# Altium PCB B6-1-1.PcbDoc
Units mil, origin at the board's own origin, x right, y up, seen from the top; angles counter-clockwise.
Board outline 2086.62 x 2086.62 mil, 2 copper layers (Top Layer, Bottom Layer); 69 components, 44 nets, 195 pads, 30 vias.
Unrouted connection lines stored in the file: 34.
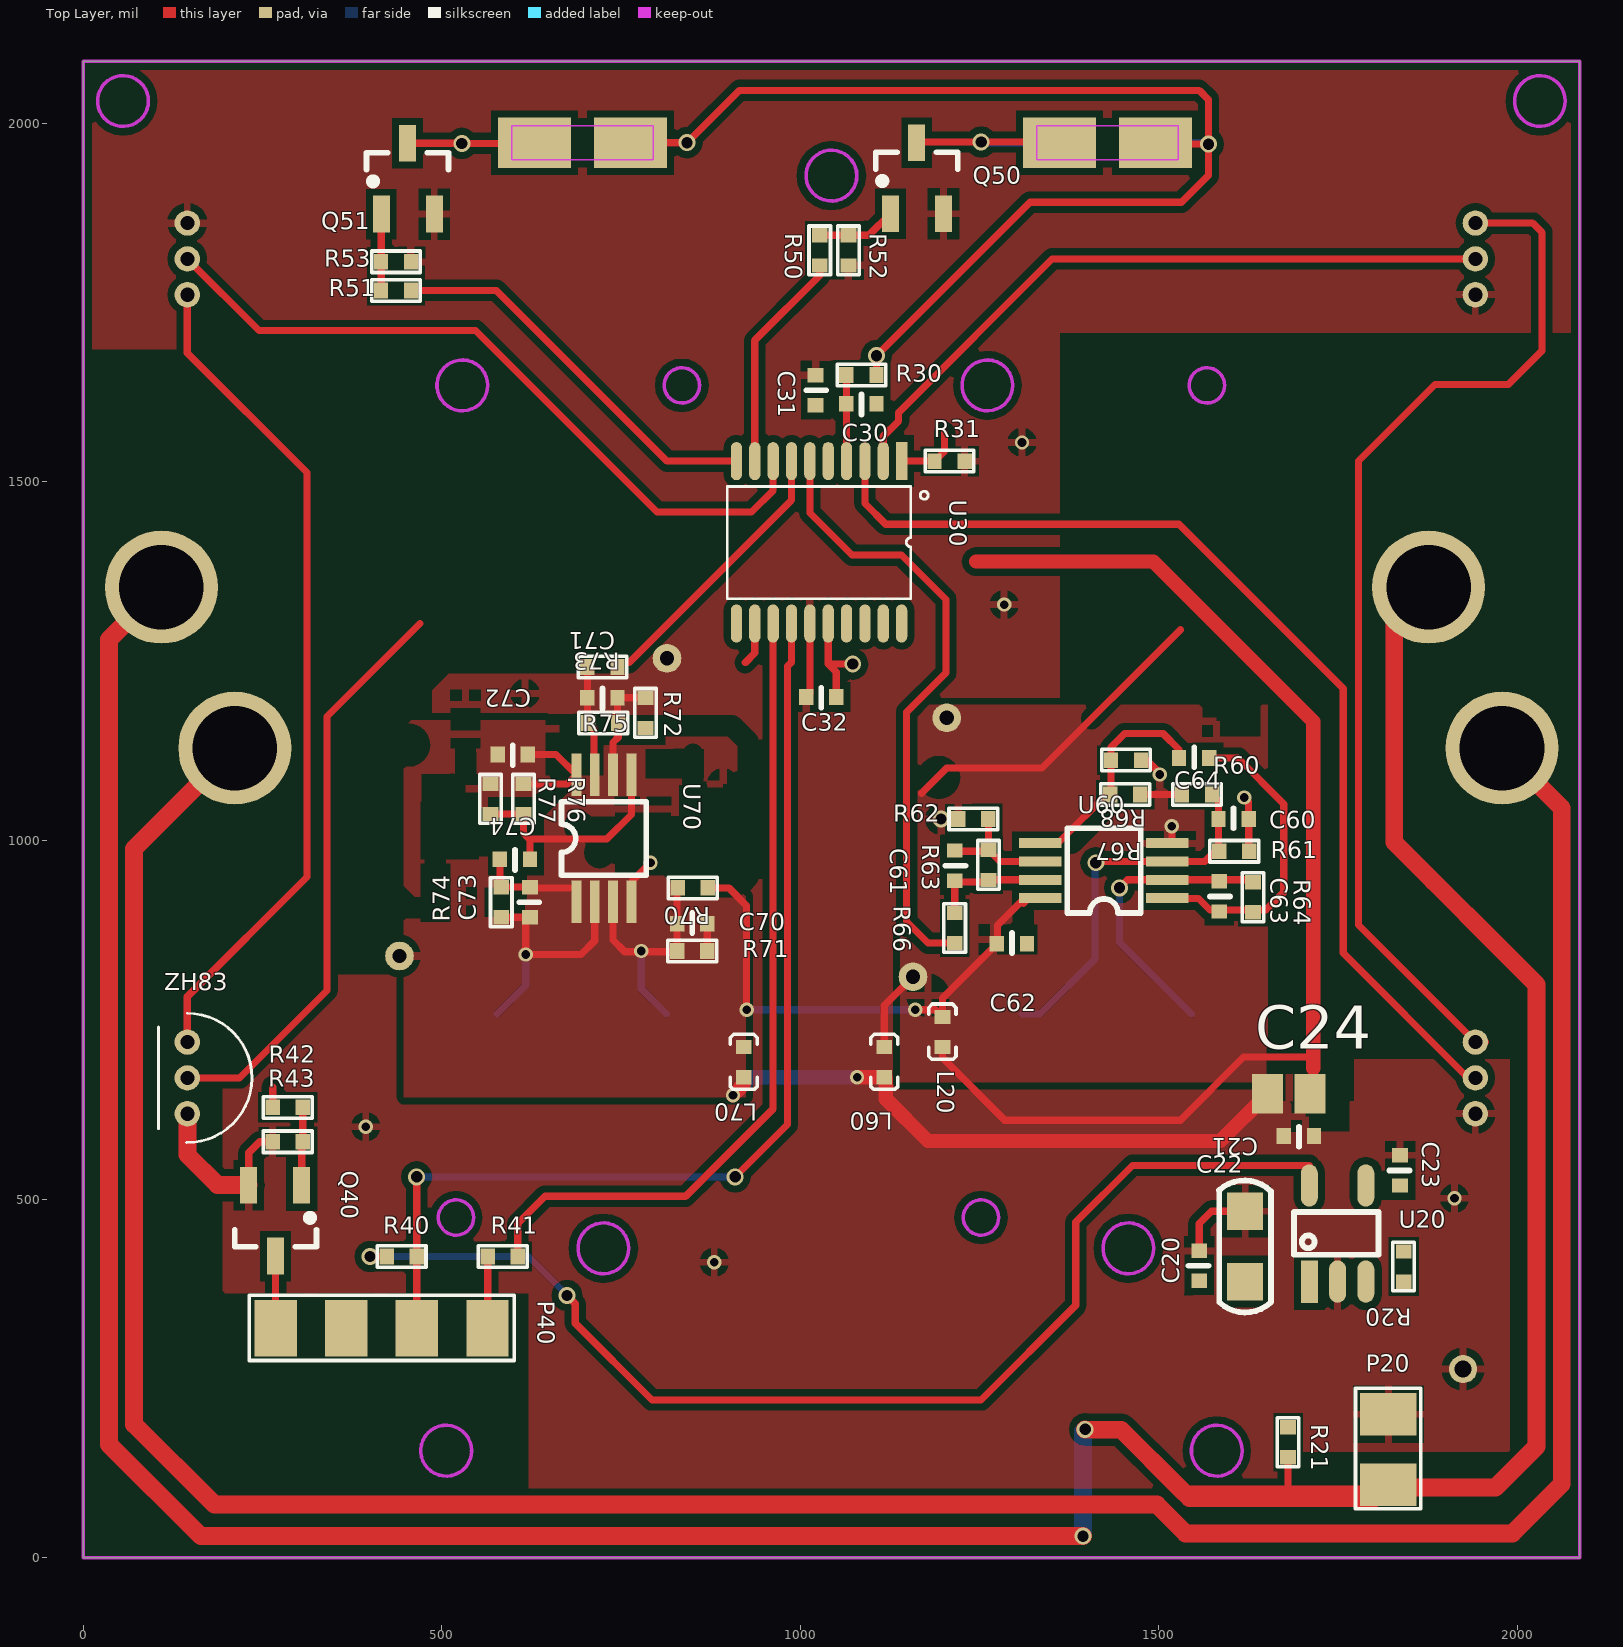
[diagram p0: Top Layer view]
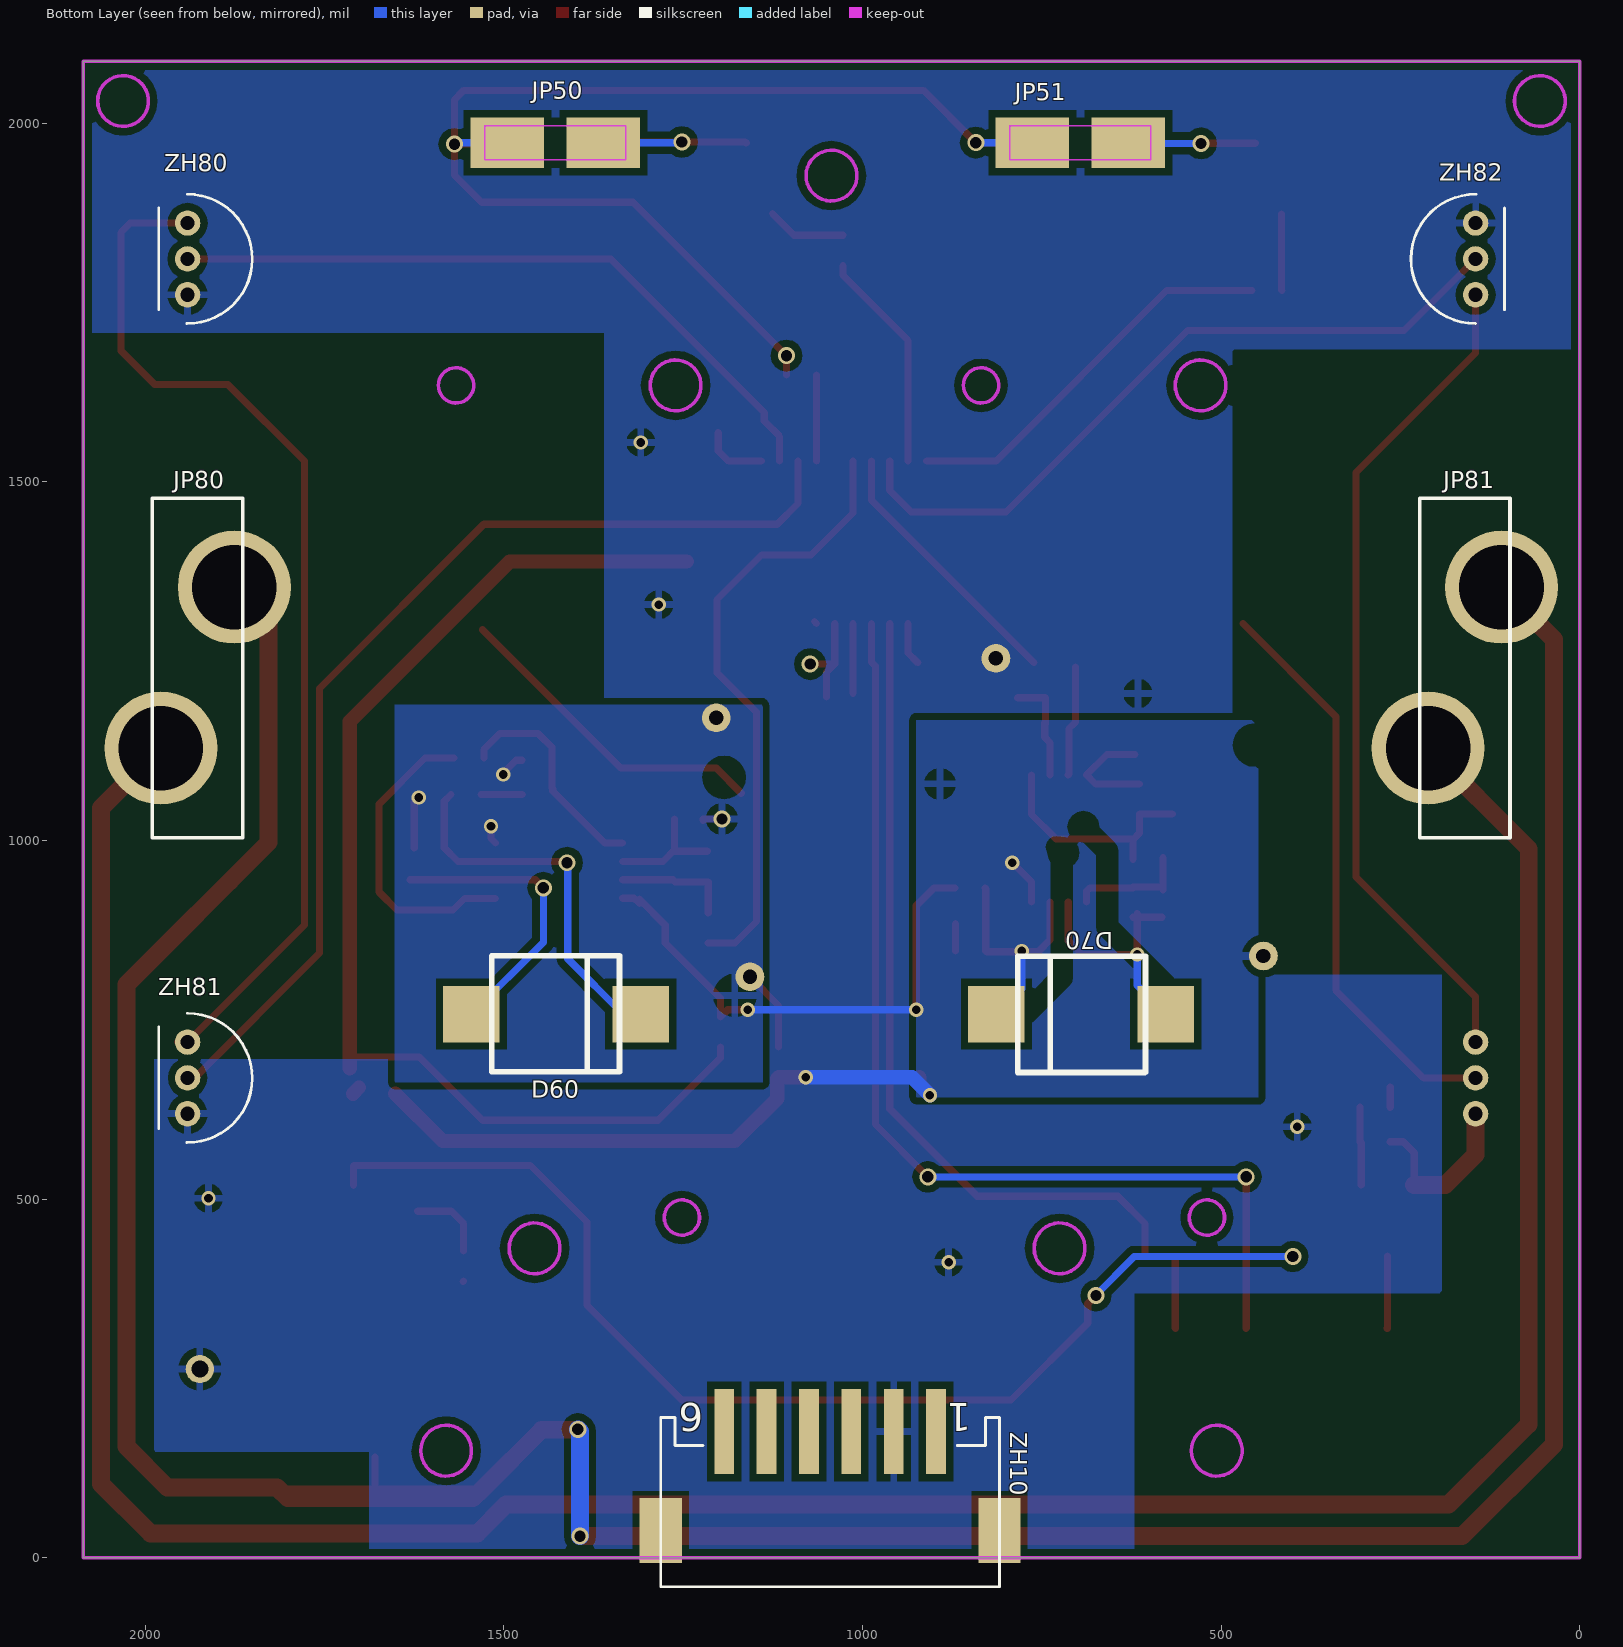
[diagram p1: Bottom Layer view, seen from below]

## Layer stack, top to bottom
Top Layer: signal copper 1.4
Dielectric: dielectric 12.6, FR-4, Dk 4.8
Bottom Layer: signal copper 1.4

## Board outline
0,0 0,2086.62 2086.62,2086.62 2086.62,0

## Design rules (kind name [scope] priority, off if disabled: settings)
Clearance [All] p1: gap=10
PolygonConnect [All] p1: connectstyle=Relief reliefconductorwidth=10 reliefentries=4 polygonreliefangle="90 Angle"
RoutingVias [All] p1: holewidth=20 width=40 viastyle="Through Hole" minholewidth=12 minwidth=20 maxholewidth=100 maxwidth=200
SilkscreenOverComponentPads [All] p1: minsilkscreentomaskgap=10
SolderMaskExpansion [All] p1: expansion=4
Width [All] p1: maxlimit=100 minlimit=8 preferedwidth=10
27 further rules are at their usual default settings.

## Classes and differential pairs
component class U_CHECK2: C70 C71 C72 C73 C74 D70 L70 R70 R71 R72 R73 R74 R75 R76 R77 U70
component class U_CHECK: C60 C61 C62 C63 C64 D60 L60 R60 R61 R62 R63 R64 R66 R67 R68 U60
component class U_INTERFACE: ZH10
component class U_LASER: JP50 JP51 Q50 Q51 R50 R51 R52 R53
component class U_MCU_STM32: C30 C31 C32 R30 R31 U30
component class U_POWER: C20 C21 C22 C23 C24 C200 C201 D200 J200 L20 L200 P20 R20 R21 U20
component class U_FAN: P40 Q40 R40 R41 R42 R43
component class U_TEMP: JP80 JP81 ZH80 ZH81 ZH82 ZH83

## Components (designator, comment, footprint, x,y, rotation, side; value= is the part's Value field where it differs from the comment)
C20 "0.1uf" C0402 1556.15,385.99 r90 top
C21 "0.1uf" C0402 1716.15,587.99 r180 top
C22 "22uF" 0805C 1656.15,345.99 r90 top
C23 "0.1uf" C0402 1836.15,518.99 r90 top
C24 "22uF" C0805 1681,647 r180 top
C30 "0.1uf" C0402 1106.15,1608.99 r180 top
C31 "0.1uf" C0402 1021.15,1648.99 r270 top
C32 "0.1uf" C0402 1050,1200 r180 top
C60 "0.1uf" C0402 1583,1030 r0 top
C61 "100pf" C0402 1215.15,985.99 r270 top
C62 "0.1uf" C0402 1274,856 r0 top
C63 "0.5pf" C0402 1584,943 r270 top
C64 "68nf/16v" C0402 1528,1115 r0 top
C70 "0.1uf" C0402 828.15,883.99 r0 top
C71 "100pf" C0402 745,1199 r180 top
C72 "0.1uf" C0402 620,1120 r180 top
C73 "0.5pf" C0402 622.85,893.01 r90 top
C74 "68nf/16v" C0402 623,974 r180 top
D60 "Photo Sen" PhotoSen 1427.15,757.99 r90 bottom locked
D70 "Photo Sen" PhotoSen 695.15,757.99 r270 bottom locked
JP50 "Header" LASER_2PIN_NEW 1495.15,1972.99 r270 bottom
JP51 "Header" LASER_2PIN_NEW 763.15,1972.99 r270 bottom
JP80 "Header" HEATER 1927.15,1240.99 r270 bottom
JP81 "Header" HEATER 160.15,1240.99 r270 bottom
L20 "Inductor" L0402 1198,752 r270 top
L60 "Inductor" L0402 1117,710 r270 top
L70 "Inductor" L0402 921,710 r270 top
P20 "Header 2" FAN_2PAD 1820,200 r0 top
P40 "Header 4" FAN_4PADS 416,320 r270 top
Q40 "AO3401" SI2300 268.15,459.99 r270 top
Q50 "AO3401" SI2300 1162.15,1933.58 r90 top
Q51 "AO3401" SI2300 452.15,1932.99 r90 top
R20 "0R" R0402 1841.15,426.99 r270 top
R21 "0R" R0402 1680,140 r90 top
R30 "1k" R0402 1064.15,1648.99 r0 top
R31 "1k" R0402 1186.99,1528.99 r0 top
R40 "1K" R0402 423,420 r0 top
R41 "30K" R0402 606,420 r180 top
R42 "20" R0402 306.15,627.99 r180 top
R43 "10k" R0402 306.15,579.99 r180 top
R50 "20" R0402 1026.99,1843.85 r270 top
R51 "20" R0402 415.15,1766.99 r0 top
R52 "10k" R0402 1066.99,1843.85 r270 top
R53 "10k" R0402 415.15,1806.99 r0 top
R60 "2.7k" R0402 1532,1064 r0 top
R61 "1K" R0402 1584,985 r0 top
R62 "3k" R0402 1220.15,1029.99 r0 top
R63 "220k" R0402 1262.15,986.99 r270 top
R64 "10m" R0402 1631,942 r270 top
R66 "2k" R0402 1215.15,856.99 r90 top
R67 "1M" R0402 1474,1064 r180 top
R68 "510" R0402 1433,1112 r0 top
R70 "2.7k" R0402 871,934 r180 top
R71 "1K" R0402 828.15,845.99 r0 top
R72 "3k" R0402 784,1157 r90 top
R73 "220k" R0402 746,1164 r180 top
R74 "10m" R0402 582.85,893.01 r90 top
R75 "2k" R0402 745,1242 r180 top
R76 "1M" R0402 614,1079 r270 top
R77 "510" R0402 568,1037 r90 top
U20 "RT9013-33" SOT-23-5 1807.15,351.42 r90 top
U30 "STM32F030F4Px" TSSOP-20 1141.15,1528.99 r270 top
U60 "LMC6492" MSOP8 1423.15,957.99 r180 top
U70 "LMC6492" MSOP8 726,1003 r90 top
ZH10 "ZH-6ABW" ZH-6ABW 1045.15,175.99 r0 bottom
ZH80 "ZH-3A" DS18B20 1941.15,1810.99 r90 bottom
ZH81 "ZH-3A" DS18B20 1941.15,668.99 r90 bottom
ZH82 "ZH-3A" DS18B20 145.15,1810.99 r270 bottom
ZH83 "ZH-3A" DS18B20 145.15,668.99 r90 top

## Footprints (in the part's own frame and the unit in brackets; to place one, negate y for a bottom-side part, rotate by r counter-clockwise, add the part's x,y. Pads: shape width x height; smd on the part's side, far side on the other; paste and mask are expansions set on the pad)
0805C [mil]
  rect 52.13x50 smd: 1(39,36) 2(137,36)
  silkscreen extent -4,0 180,72
C0402 [mil] "CAP_NP_C0402"
  rect 20x22 smd: 1(0,0) 2(42,0)
  silkscreen extent 21,-13 21,15
C0805 [mm] "Chip Capacitor, Body 2.0x1.3mm, IPC High Density"
  rect 1.1x1.4 smd: 1(-0.75,0) 2(0.75,0)
  body extent -1.1,-0.72 1.1,0.72, height 1.4
DS18B20 [mm]
  round 0.9 hole 0.5: 1(-1.27,0) 2(0,0) 3(1.27,0)
  silkscreen extent -2.29,-2.29 2.29,1.02
FAN_2PAD [mm]
  rect 2x1.5 smd: 1(0,-2.5) 2(0,0)
  silkscreen extent -1.17,-3.35 1.14,0.91
FAN_4PADS [mm]
  rect 2x1.5 smd: 1(0,3.75) 2(0,1.25) 3(0,-1.25) 4(0,-3.75)
  silkscreen extent -1.17,-4.69 1.14,4.7
HEATER [mm]
  round 4 hole 3: 1(-2.85,1.3) 2(2.85,-1.3)
  silkscreen extent -6,-1.6 6.02,1.6
L0402 [mil]
  rect 20x22 smd: 1(-2,0) 2(40,0)
  silkscreen extent -20,-19 57,19
LASER_2PIN_NEW [mm]
  rect 1.8x2.6 smd far side: 1(0,3.4) 2(0,0)
  rect 1.8x2.6 smd: 1(0,3.4) 2(0,0)
  Keep-Out Layer lines w0.05: 0.6,4.2 0.6,-0.8 -0.6,-0.8 -0.6,4.2 0.6,4.2
MSOP8 [mm]
  rect 1.5x0.35 smd: 1(-2.25,0.975) 2(-2.25,0.325) 3(-2.25,-0.325) 4(-2.25,-0.975) 5(2.25,-0.975) 6(2.25,-0.325) 7(2.25,0.325) 8(2.25,0.975)
  silkscreen extent -1.3,-1.5 1.3,1.5
PhotoSen [mm]
  rect 2x2 smd: 1(0,-3) 2(0,3)
  silkscreen extent -2.04,-2.24 2.07,2.28
R0402 [mil] "RESISTOR-R0402"
  rect 20x22 smd: 1(0,0) 2(42,0)
  silkscreen extent -13,-15 55,15
SI2300 [mm] "SOT23, 3-Leads, Body 2.9x2.4mm (max), Pitch 0.95mm, IPC Medium Density"
  rect 1.3x0.6 smd: 1(-1.511,0.927) 2(-1.511,-0.95) 3(1,0)
  silkscreen extent -0.48,-1.45 0.66,1.45
SOT-23-5 [mm]
  rect 1.5x0.6 smd: 1(0.851,2.476)
  oval 1.5x0.6 smd: 2(0.851,1.476) 3(0.851,0.476) 4(4.257,0.476) 5(4.257,2.477)
  silkscreen extent 1.8,0.03 3.31,3.02
TSSOP-20 [mm]
  rect 1.35x0.4 smd mask+0.05: 1(0,0)
  oval 1.35x0.4 smd mask+0.05: 2(0,-0.65) 3(0,-1.3) 4(0,-1.95) 5(0,-2.6) 6(0,-3.25) 7(0,-3.9) 8(0,-4.55) 9(0,-5.2) 10(0,-5.85) 11(5.75,-5.85) 12(5.75,-5.2) 13(5.75,-4.55) 14(5.75,-3.9) 15(5.75,-3.25) 16(5.75,-2.6) 17(5.75,-1.95) 18(5.75,-1.3) 19(5.75,-0.65) 20(5.75,0)
  silkscreen extent 0.9,-6.18 4.87,0.94
ZH-6ABW [mm]
  rect 1.5x2.3 smd: 0(-6,3.5) 0(6,3.5)
  rect 0.7x3 smd: 1(-3.75,0) 2(-2.25,0) 3(-0.75,0) 4(0.75,0) 5(2.25,0) 6(3.75,0)
  silkscreen extent -6,-0.5 6,5.5

## Part data
C20 C21 C23: library part CC
C22 C24: library part CTaA, "Tantalum Capacitor A"
C30 C31 C32: library part C0402, "Capacitor 0402"
C60 C61 C62 C63 C64 C70 C71 C72 C73 C74: library part CC, "C"
D60 D70: "Photosensitive Diode"
JP50 JP51 JP80 JP81: library part "Header 2", "Header, 2-Pin"
P20: "Header, 2-Pin"
P40: "Header, 4-Pin"
Q40 Q50 Q51: library part MOSFET-N, "N-Channel MOSFET"
R20 R21 R30 R31 R40 R41: library part R0402, "Resistor 0402"
R42 R43 R50 R51 R52 R53: library part RES1
R60 R61 R62 R63 R64 R66 R67 R68 R70 R71 R72 R73 R74 R75 R76 R77: library part RES1, "R"
ZH10 ZH80 ZH81 ZH82 ZH83: "1.5mm"

## Free pads (board coordinates)
  round 40 hole 20: 0(441,839) 0(814,1254) 0(1157,810) 0(1204,1171)
  round 39.37 hole 23.62: 1(1924,263)

## Via types
v1: diameter 20, hole 12, Top Layer to Bottom Layer, 15 vias
v2: diameter 23.62, hole 15.75, Top Layer to Bottom Layer, 15 vias

## Nets (pads, with @x,y where several pads share a name; then routed paths per layer and width w, separated by ;. In a path a pad name is that pad's centre, name@x,y a point inside that pad or via, vN(x,y) a via of type N, cw(c..) or ccw(c..) an arc to the next point about the centre after c; other vN are vias at no path point)
ADC_AC: pad.0@1204,1171 R66.1 U30.6 | length 863.4
  Top Layer w10: U30.6 1013.2,1456.8 1072,1398 1141,1398 1203,1336 1203,1234 1148,1179 1148,887 1178,857 R66.1
ADC_AC2: pad.0@814,1254 R75.1 U30.7 | length 374.9
  Top Layer w10: 761,1248 987.61,1474.61 U30.7
AGND: C60.2 C62.2 C70.2 C72.2 L60.1 L70.1 pad.0@441,839 pad.0@1157,810 R61.2 R62.1 R68.2 R71.2 R72.1 R77.2 U60.4 U70.4 | length 383.5
  Top Layer w10: U70.4 764.39,942.39 v1(791,969) ; R71.2 C70.2 ; L60.1 1117,770 pad.0@1157,810 ; v2@1196.01,1029.99 R62.1 ; R62.1@1222.15,1027.99 R62.1@1222.15,1029.99 ; R68.2 1483,1112 1501,1094 v1(1501,1092) ; U60.4 1518,1002.64 v1(1518,1020) ; v1(1619,1060) 1625,1054 C60.2 ; R61.2@1625.15,989.99 C60.2@1625.15,1034.99
  other v2: 1196,1030
AVCC33: C31.2 C62.1 C72.1 L20.1 R60.1 R67.1 R70.1 R76.1 U30.5 U60.8 U70.8 | length 1401.7
  Top Layer w10: R76.1 675.03,1079 U70.8 659.2,1120 C72.1 ; R70.1 900,934 925,909 v1(925,764) ; v1(1160,764) 1188,764 L20.1 1198,780 C62.1 1275,857 1275,882 1311,918 1311,912 1318.6,919.6 U60.8 ; 1169,1066 1204,1101 1337,1101 1530,1294 ; R67.1 R60.1
  Bottom Layer w10: v1(925,764) v1(1160,764)
DVCC5: C20.1 C22.1 P40.3 R20.1 R21.2 U20.1 ZH10.1 ZH80.3 ZH81.3 ZH82.3 ZH83.3 | length 2659.9
  Top Layer w10: ZH83.3 145.15,782.15 312,949 312,1513 145.15,1679.85 ZH82.3 ; C20.1 C20.1@1557.22,384.92 ; ZH80.3 2021.01,1860.99 2034,1848 2034,1683 1987,1636 1885,1636 1778,1529 1778,882.14 ZH81.3 ZH81.3@1955.01,718.99
  Bottom Layer w10: ZH83.3@145.15,715.26 ZH83.3
DVCC12: JP80.1 JP81.1 P20.1 R21.1 | length 5115
  Top Layer w10: 1530,95.8 P20.1@1814.23,95.8 ; 1680,97.8 R21.1 ; 1875.97,942.14 1875.97,939.03 1878.17,936.83
  Top Layer w25: JP81.1 36,1280.23 36,158 164,30 v2(1394,30) ; v2(1397,179) 1397.57,178.43 1447.38,178.43 1530,95.8 1542.8,83 1801.43,83 1814.23,95.8 P20.1@1816.23,97.8 ; P20.1@1820,97.8 1969.42,97.8 2026.5,154.88 2026.5,799.11 1828,997.61 1828,1305.23 JP80.1
  Bottom Layer w25: v2(1394,30) 1394,176 v2(1397,179)
DVCC33: C21.1 C24.1 C32.1 JP50.2@1495.15,1972.99 JP51.2@763.15,1972.99 L20.2 R30.2 R40.1 U20.5 U30.16 | length 5237.6
  Top Layer w10: v2(400,420) R40.1 ; v2(674.5,365.5) 686,354 686,327 793,220 1252,220 1384,352 1384,468 1463,547 1709.65,547 U20.5 ; 763.16,1973 v2(842,1973) 915,2046 1556,2046 1569,2033 v2(1569,1971) ; U30.16 1038.79,1246 ; C32.1 1050,1234.79 1038.79,1246 ; v2(1073,1246) 1038.79,1246 ; v2(1106,1676) 1320,1890 1531.37,1890 1569,1927.63 v2(1569,1971) ; R30.2 v2@1106.15,1675.85 ; L20.2 1198,697 1285,610 1530,610 1618,698 1715,698 ; 1495.15,1972.99 1497.14,1971 v2(1569,1971)
  Top Layer w20: 1245,1389 1492,1389 1715,1166 1715,698 1715,682.53 ; C24.1@1702,655.53 C24.1
  Bottom Layer w10: v2(400,420) 621,420 v2@676,365 ; JP51.2@763.15,1972.99 v2(842,1973) ; JP50.2@1495.15,1972.99 1567.01,1972.99 v2(1569,1971)
  Bottom Layer w12: JP50.2@1495,1972.84 JP50.2@1495.15,1972.99
FAN_EN: R42.2 U30.12 | length 88.3
  Top Layer w10: R42.2 264.15,656.15 ; 923,1248 936.42,1261.42 U30.12
GND: C20.2 C21.2 C22.2 C23.2 C24.2 C30.1 C31.1 C32.2 JP80.2 JP81.2 L60.2 L70.2 P20.2 pad.1 Q40.2 Q50.2 Q51.2 R31.2 R43.2 R52.2 R53.2 U20.2 U30.15 ZH10.2 ZH80.1 ZH81.1 ZH82.1 ZH83.1 | length 5467.1
  Top Layer w10: 66,383 71,378 ; Q40.2 230.75,564.59 246.15,579.99 R43.2 ; C32.2@1013.2,1205.2 U30.15 ; C20.2 1556.15,465.99 1573.15,482.99 C22.2
  Top Layer w20: v1(906,645) 921,660 L70.2 ; v1(1079,670) L60.2 ; L60.2@1119,668 1119,640 1178,581 1585.47,581 C24.2
  Top Layer w25: ZH83.1 145.15,561.85 187.51,519.49 Q40.2 ; JP81.2 71,988.45 71,378 71,186 183,74 1497,74 1537,34 1993,34 2061.62,102.62 2061.62,1045.5 JP80.2
  Bottom Layer w20: v1(906,645) 931,670 v1(1079,670)
  other v1: 880,412 1912,501 394,601 1284,1329 1309,1555
GPIO_FAN: R41.1 U30.13 | length 1144.9
  Top Layer w10: R41.1 606,466 644,504 840,504 962.02,626.02 U30.13
GPIO_LASER: R50.2 U30.9 | length 310.4
  Top Layer w10: U30.9 936.42,1697.42 1026.99,1787.99 R50.2
GPIO_LASER2: R51.2 U30.10 | length 552.3
  Top Layer w10: R51.2 576.01,1766.99 814.01,1528.99 U30.10
NetC23_1: C23.1 U20.4
NetC60_1: C60.1 D60.1 R60.2 R61.1 U60.3 | length 525.5
  Top Layer w10: v2(1412,969) 1413.79,970.79 U60.3 1563.95,970.79 1583.15,989.99 1583.15,1054.85 R60.2
  Bottom Layer w10: D60.1 1333.99,757.99 1411,835 v2@1411,969
NetC61_1: C61.1 R62.2 R63.1 U60.6 | length 170.1
  Top Layer w10: C61.1@1216.15,984.99 1262.15,984.99 R63.1 ; R62.2 R63.1 ; U60.6 1278.35,970.79 R63.1
NetC61_2: C61.2 R63.2 R66.2 U60.7 | length 159.2
  Top Layer w10: R66.2 1215.15,941.99 R63.2@1261.15,941.99 ; R63.2@1264.35,945.19 U60.7
NetC63_1: C63.1 D60.2 R64.1 U60.2 | length 408.4
  Top Layer w10: v2(1445,934) 1456.19,945.19 U60.2 1630.95,945.19 R64.1@1631.15,944.99
  Bottom Layer w10: v2(1445,934) 1445,858.25 D60.2
NetC63_2: C63.2 C64.2 R64.2 U60.1 | length 432.4
  Top Layer w10: U60.1@1512.15,919.19 1554.95,919.19 1571.15,902.99 1584.15,902.99 1631.15,902.99 1648.99,902.99 1674,928 1674,1051 1610,1115 C64.2
NetC64_1: C64.1 R67.2 R68.1 U60.5 | length 312.9
  Top Layer w10: U60.5 1359.38,996.38 1432,1069 1432,1072 1433,1073 R68.1 1433,1130 1452,1149 1506,1149 1528,1127 C64.1
NetC70_1: C70.1 D70.1 R70.2 R71.1 U70.3 | length 340.7
  Top Layer w10: U70.3 738.8,861.2 755,845 827.16,845 R71.1 C70.1 828.15,933.15 R70.2
  Bottom Layer w10: v1(778,846) 778,793.25 D70.1
NetC71_1: C71.1 R72.2 R73.1 U70.6 | length 151.4
  Top Layer w10: U70.6 738.8,1136.8 746,1144 R73.1 ; R73.1@745,1162 C71.1 R72.2
NetC71_2: C71.2 R73.2 R75.2 U70.7 | length 154.6
  Top Layer w10: R75.2 C71.2 703,1165 R73.2 712,1156 712,1092.79 U70.7
NetC73_1: C73.1 D70.2 R74.1 U70.2 | length 354.8
  Top Layer w10: R74.1 C73.1 ; C73.1@617,897.86 v1(617,841) 694,841 713.2,860.2 U70.2
  Bottom Layer w10: D70.2 617,797.95 v1(617,841)
NetC73_2: C73.2 C74.2 R74.2 U70.1 | length 166.4
  Top Layer w10: R74.2@581.15,931.31 C74.2@581.15,976.15 ; R74.2@583,935.16 622.7,935.16 C73.2 ; C73.2@622.86,934 683,934 687.61,929.39 U70.1
NetC74_1: C74.1 R76.2 R77.1 U70.5 | length 322.6
  Top Layer w10: R77.1 R76.2 614,1010 623,1001 C74.1 ; 624,1002 730,1002 764.39,1036.39 U70.5
NetJP50_1: JP50.1@1361.29,1972.99 Q50.3 | length 309.7
  Top Layer w10: Q50.3 1163.2,1974 v2(1252,1974) 1360.28,1974 1361.29,1972.99
  Bottom Layer w10: v2(1252,1974) 1253.01,1972.99 JP50.1@1361.29,1972.99
NetJP51_1: JP51.1@629.29,1972.99 Q51.3 | length 279.4
  Top Layer w10: Q51.3 527.64,1972.36 v2(528,1972) 628.3,1972 629.29,1972.99
  Bottom Layer w10: v2(528,1972) 628.3,1972 JP51.1@629.29,1972.99
NetP40_1: P40.1 R41.2 | length 100.2
  Top Layer w10: P40.1 564,320.36 R41.2
NetP40_4: P40.4 Q40.3 | length 100.7
  Top Layer w10: Q40.3 268.15,320.21 P40.4
NetQ40_2: Q40.1 R42.1 R43.1 | length 109.1
  Top Layer w10: Q40.1 304.65,578.49 R43.1 R42.1
NetQ50_2: Q50.1 R50.1 R52.1 | length 111.2
  Top Layer w10: R50.1 R52.1 1095.42,1843.85 Q50.1
NetQ51_2: Q51.1 R51.1 R53.1 | length 106.7
  Top Layer w10: R51.1 415.65,1767.49 Q51.1
NetR20_2: R20.2 U20.3
NetR31_1: R31.1 U30.1 | length 91.7
  Top Layer w10: U30.1 R31.1 1201.15,1543.15 1201.15,1568.99
RESET: C30.2 R30.1 U30.4 | length 120.1
  Top Layer w10: R30.1 1064.15,1588.99 1064.15,1529.22 U30.4
RX: U30.18 ZH10.5
SWCLK: U30.20 ZH10.3
SWDIO: U30.19 ZH10.4
TEMP_DATA1: U30.2 ZH80.2 | length 969.7
  Top Layer w10: U30.2 1115.56,1563.56 1137,1585 1137,1597 1350.99,1810.99 ZH80.2
TEMP_DATA2: U30.3 ZH81.2 | length 1458.1
  Top Layer w10: U30.3 1089.97,1470.03 1119,1441 1528,1441 1757,1212 1757,843 1931.01,668.99 ZH81.2
TEMP_DATA3: U30.8 ZH82.2 | length 1016.5
  Top Layer w10: ZH82.2 245.14,1711 547,1711 800,1458 932,1458 962.02,1488.02 U30.8
TEMP_DATA4: U30.11 ZH83.2 | length 810.7
  Top Layer w10: ZH83.2 217.99,668.99 340,791 340,1173 469.61,1302.61
TIM_FAN: P40.2 R40.2 U30.14 | length 1459.3
  Top Layer w10: v2(465,531) R40.2 465,320.21 P40.2 ; v2(909,531) 982.02,604.02 982.02,1243.02 987.61,1248.61 U30.14
  Bottom Layer w10: v2(465,531) v2(909,531)
TX: U30.17 ZH10.6 | length 3.8
  Top Layer w10: U30.17 U30.17@1067.09,1305.33
pads on no net: JP50.1@1361.29,1972.99 JP50.2@1495.15,1972.99 JP51.1@629.29,1972.99 JP51.2@763.15,1972.99 ZH10.0

## Polygon pours and split planes (outlines as drawn)
GND on Top Layer "Top Layer-No Net" (solid, remove dead copper, pour order 14): 610,-93 621,-82 621,528 1682,528 1718,492 1688,462 1688,-98 615,-98 610,-93
GND on Top Layer "Top Layer-No Net" (solid, remove dead copper, pour order 13): 1992.11,148 1555.8,148 1554.85,149 1548.19,156 1548.19,369 197.44,369 196.49,370 194.59,372 194.59,813 476.91,813 477.86,814 486.41,823 486.41,1682 483.56,1685 -44,1685 -44,2149 -43.05,2150 -6.93,2188 2148,2188 2148,1712 2144.2,1708 1361.88,1708 1361.88,723 1388.51,694.99 1989.26,694.99 1989.26,150.99 1992.11,148
AGND on Top Layer "Top Layer-No Net" (solid, remove dead copper, pour order 12): 1136,1189 1139.22,1186 1139.22,663 1653,663 1651.93,664 1651.93,1189 1136,1189
AGND on Top Layer "Top Layer-No Net" (solid, remove dead copper, pour order 11): 444,1168 447,1165 447,642 925,642 924,643 924,1168 444,1168
GND on Bottom Layer "Top Layer-No Net" (solid, remove dead copper, pour order 16): 1990.11,148 1553.8,148 1552.85,149 1546.19,156 1546.19,369 195.44,369 194.49,370 192.59,372 192.59,813 474.91,813 475.86,814 484.41,823 484.41,1682 481.56,1685 -46,1685 -46,2149 -45.05,2150 -8.93,2188 2146,2188 2146,1712 2142.2,1708 1359.88,1708 1359.88,723 1386.51,694.99 1987.26,694.99 1987.26,150.99 1990.11,148
GND on Bottom Layer "Top Layer-No Net" (solid, remove dead copper, pour order 15): 610,-92 621,-81 621,529 1682,529 1718,493 1688,463 1688,-97 615,-97 610,-92
AGND on Bottom Layer "Top Layer-No Net" (solid, remove dead copper, pour order 10): 1136,1189 1139.22,1186 1139.22,663 1653,663 1651.93,664 1651.93,1189 1136,1189
AGND on Bottom Layer "Top Layer-No Net" (solid, remove dead copper, pour order 9): 445,1168 448,1165 448,642 926,642 925,643 925,1168 445,1168

## Keep-outs
Keep-Out Layer:
  circle w5: c1043.31,1927.07 r35.43
  circle w5: c2031.12,2031.12 r35.43
  circle w5: c1580.6,149.19 r35.43
  circle w5: c506.02,149.19 r35.43
  circle w5: c55.49,2031.12 r35.43
  circle w5: c834.76,1634.65 r24.61
  circle w5: c519.8,474.3 r24.61
  circle w5: c528.64,1634.65 r35.43
  circle w5: c725.3,431.36 r35.43
  circle w5: c1566.82,1634.65 r24.61
  circle w5: c1251.86,474.3 r24.61
  circle w5: c1260.7,1634.65 r35.43
  circle w5: c1457.35,431.36 r35.43
  lines w5: 0,0 0,2086.62 2086.62,2086.62 2086.62,0 0,0

## Silkscreen, mask and mechanical layers (free items; w line width, h text height)
Bottom Solder:
  lines w5: 100.58,1003.94 218.69,1003.94 218.69,1476.38 100.58,1476.38 100.58,1003.94 ; 136.99,605.51 136.99,624.41 153.53,624.41 153.53,605.51 136.99,605.51 ; 136.99,659.84 136.99,678.74 153.53,678.74 153.53,659.84 136.99,659.84 ; 136.99,714.17 136.99,733.07 153.53,733.07 153.53,714.17 136.99,714.17 ; 136.99,1747.25 136.99,1766.14 153.53,1766.14 153.53,1747.25 136.99,1747.25 ; 136.99,1801.58 136.99,1820.47 153.53,1820.47 153.53,1801.58 136.99,1801.58 ; 136.99,1855.91 136.99,1874.8 153.53,1874.8 153.53,1855.91 136.99,1855.91 ; 603.22,1952.76 788.26,1952.76 788.26,1992.13 603.22,1992.13 603.22,1952.76 ; 607.15,688.98 784.32,688.98 784.32,826.77 607.15,826.77 607.15,688.98 ; 807.09,-39.37 1279.53,-39.37 1279.53,0 1279.53,157.48 807.09,157.48 807.09,0 807.09,-39.37 ; 1335.27,1952.76 1335.27,1992.13 1520.31,1992.13 1520.31,1952.76 1335.27,1952.76 ; 1339.21,688.98 1516.38,688.98 1516.38,826.77 1339.21,826.77 1339.21,688.98 ; 1867.93,1003.94 1986.04,1003.94 1986.04,1476.38 1867.93,1476.38 1867.93,1003.94 ; 1933.09,605.51 1933.09,624.41 1949.62,624.41 1949.62,605.51 1933.09,605.51 ; 1933.09,659.84 1933.09,678.74 1949.62,678.74 1949.62,659.84 1933.09,659.84 ; 1933.09,714.17 1933.09,733.07 1949.62,733.07 1949.62,714.17 1933.09,714.17 ; 1933.09,1747.25 1933.09,1766.14 1949.62,1766.14 1949.62,1747.25 1933.09,1747.25 ; 1933.09,1801.58 1933.09,1820.47 1949.62,1820.47 1949.62,1801.58 1933.09,1801.58 ; 1933.09,1855.91 1933.09,1874.8 1949.62,1874.8 1949.62,1855.91 1933.09,1855.91

## Text inside footprints (layer, text, board x,y; h text height)
ZH10: Bottom Overlay "6" at 1222.32,215.36 h39.37 r180; Bottom Overlay "1" at 848.3,215.36 h39.37 r180